# EAGLE board Timer Alarm (EAGLE 7.6.0)

Size 73.58 x 63.39 mm. Coordinates in mm from the lower left corner, seen from the top.
Outline: 0,0 56.82,0 56.82,53.33 0,53.33 0,0
Copper layers (1*16): Top 0.035mm / dielectric 1.5mm / Bottom 0.035mm
Design rules "default": minimum track width 10mil, minimum drill 24mil, track to track 8mil, track to pad 8mil, pad to pad 8mil, via to via 8mil, smd to smd 8mil, copper to edge 40mil, drill to drill 8mil, minimum pad ring 10mil, minimum via ring 8mil, stop-mask expansion 4mil, vias tented up to drill 0mil, thermal gap 10mil

## Footprints (pad centres in the part's own frame; a part is rotated, then mirrored left to right if it is on the bottom)
LED5MM = drill 0.813 octagon: A -1.27,0; K 1.27,0
HDSP-M = drill 0.813 long: 1 -5.08,-7.62; 2 -2.54,-7.62; 3 0,-7.62; 4 2.54,-7.62; 5 5.08,-7.62; 6 5.08,7.62; 7 2.54,7.62; 8 0,7.62; 9 -2.54,7.62; 10 -5.08,7.62
PIEZO-22MM = drill 1 pad 2.54: P$1 -5,0; P$2 5,0
0207/10 = drill 0.813 octagon: 1 -5.08,0; 2 5.08,0
TL1105 = drill 1 pad 1.676: 1 -2.25,3.25; 2 2.25,3.25; 3 -2.25,-3.25; 4 2.25,-3.25
ARDUINO_UNO = drill 1.016 pad 1.88: 0 63.5,50.8; 1 60.96,50.8; 2 58.42,50.8; 3 55.88,50.8; 3.3V 35.56,2.54; 4 53.34,50.8; 5 50.8,50.8; 5V 38.1,2.54; 6 48.26,50.8; 7 45.72,50.8; 8 41.656,50.8; 9 39.116,50.8; 10 36.576,50.8; 11 34.036,50.8; 12 31.496,50.8; 13 28.956,50.8; A0 50.8,2.54; A1 53.34,2.54; A2 55.88,2.54; A3 58.42,2.54; A4 60.96,2.54; A5 63.5,2.54; AREF 23.876,50.8; GND 26.416,50.8; GND. 43.18,2.54; GND.. 40.64,2.54; I/OREF 30.48,2.54; N/C 27.94,2.54; RESET 33.02,2.54; SCL 18.796,50.8; SDA 21.336,50.8; VIN 45.72,2.54 | hole 3.2: 66.04,7.62; 66.04,35.56; 15.24,50.8; 13.97,2.54
DIL16 = drill 0.813 long: 1 -8.89,-3.81; 2 -6.35,-3.81; 3 -3.81,-3.81; 4 -1.27,-3.81; 5 1.27,-3.81; 6 3.81,-3.81; 7 6.35,-3.81; 8 8.89,-3.81; 9 8.89,3.81; 10 6.35,3.81; 11 3.81,3.81; 12 1.27,3.81; 13 -1.27,3.81; 14 -3.81,3.81; 15 -6.35,3.81; 16 -8.89,3.81

## Placement (x,y rotation side)
Dfreeze_led_pin  [LED5MM]  5,276.78 0 top  (outside the outline)
Digit3  [HDSP-M]  5,22.78 0 top
Digit4  [HDSP-M]  5,35.48 0 top
Digit5  [HDSP-M]  5,48.18 0 top
Digit6  [HDSP-M]  5,60.88 0 top
PIEZOpiezo_pin  [PIEZO-22MM]  5,162.48 0 top  (outside the outline)
R1  470‎Ω  [0207/10]  5,73.58 0 top  (outside the outline)
R2  470‎Ω  [0207/10]  5,86.28 0 top  (outside the outline)
R3  470‎Ω  [0207/10]  5,98.98 0 top  (outside the outline)
R4  470‎Ω  [0207/10]  5,111.68 0 top  (outside the outline)
R5  470‎Ω  [0207/10]  5,124.38 0 top  (outside the outline)
R6  470‎Ω  [0207/10]  5,137.08 0 top  (outside the outline)
R7  470‎Ω  [0207/10]  5,149.78 0 top  (outside the outline)
R8  1k‎Ω  [0207/10]  5,175.18 0 top  (outside the outline)
R13  1k‎Ω  [0207/10]  5,365.68 0 top  (outside the outline)
R14  1k‎Ω  [0207/10]  5,378.38 0 top  (outside the outline)
R15  1k‎Ω  [0207/10]  5,391.08 0 top  (outside the outline)
R16  1k‎Ω  [0207/10]  5,403.78 0 top  (outside the outline)
R17  1k‎Ω  [0207/10]  5,416.48 0 top  (outside the outline)
R18  1k‎Ω  [0207/10]  5,429.18 0 top  (outside the outline)
R19  1k‎Ω  [0207/10]  5,238.68 0 top  (outside the outline)
R20  1k‎Ω  [0207/10]  5,251.38 0 top  (outside the outline)
R21  1k‎Ω  [0207/10]  5,264.08 0 top  (outside the outline)
S5  [TL1105]  5,289.48 0 top  (outside the outline)
Sminutes_tens  [TL1105]  5,340.28 0 top  (outside the outline)
Sminutes_units  [TL1105]  5,352.98 0 top  (outside the outline)
Sreset_btn1  [TL1105]  5,302.18 0 top  (outside the outline)
Sseconds_tens  [TL1105]  5,314.88 0 top  (outside the outline)
Sseconds_units  [TL1105]  5,327.58 0 top  (outside the outline)
Sspeed2x_pin  [TL1105]  5,225.98 0 top  (outside the outline)
Sspeed3x_pin  [TL1105]  5,213.28 0 top  (outside the outline)
Sspeed4x_pin  [TL1105]  5,200.58 0 top  (outside the outline)
Sstart_pin  [TL1105]  5,187.88 0 top  (outside the outline)
U1  [ARDUINO_UNO]  5,10.08 0 top
U2  [DIL16]  5,441.88 0 top  (outside the outline)

## Library data of the parts
Dfreeze_led_pin Digit3-Digit6 PIEZOpiezo_pin R1-R8 R13-R21 S5 Sminutes_tens Sminutes_units Sreset_btn1 Sseconds_tens Sseconds_units Sspeed2x_pin Sspeed3x_pin Sspeed4x_pin Sstart_pin U1 U2 = AUTODESK_CIRCUITS_BREADBOARD

## Nets
N$1: Digit3.9 Digit4.9 Digit5.9 Digit6.9 R2.2
N$2: Digit3.2 Digit4.2 Digit5.2 Digit6.2 R5.2
N$3: R4.1 U2.4
N$4: U1.12 U2.11
N$5: PIEZOpiezo_pin.P$1 U1.9
N$6: R8.2 Sstart_pin.4 U1.13
N$7: Sstart_pin.3 U1.GND
N$8: S5.2 U1.A0
N$9: R17.2 Sreset_btn1.4
N$10: R16.2 Sseconds_tens.4
N$11: R14.2 Sminutes_tens.4
N$12: R13.2 Sminutes_units.4
N$13: R21.2 Sspeed2x_pin.3
N$14: R20.2 Sspeed3x_pin.3
N$15: R19.2 Sspeed4x_pin.3
N$16: Sspeed4x_pin.1 U1.10
N$17: Sspeed2x_pin.1 U1.6
N$18: Sspeed3x_pin.1 U1.7
N$19: Sminutes_units.2 U1.5
N$20: Sminutes_tens.2 U1.4
N$21: Sseconds_tens.2 U1.2
N$22: Sreset_btn1.2 U1.1
N$23: R1.1 U2.6
N$24: Digit3.8 U1.A5
N$25: Digit6.8 U1.A4
N$26: Digit5.8 U1.A3
N$27: Digit3.1 Digit4.1 Digit5.1 Digit6.1 R4.2
N$28: Digit6.3
N$29: Digit6.5
N$30: Digit3.6 Digit4.6 Digit5.6 Digit6.6 R7.2
N$31: Digit5.3
N$32: Digit5.5
N$33: Digit4.8 U1.A2
N$34: Digit4.5
N$35: R7.1 U2.1
N$36: Digit3.4 Digit4.4 Digit5.4 Digit6.4 R3.2
N$37: Digit3.7 Digit4.7 Digit5.7 Digit6.7 R6.2
N$38: Digit3.10 Digit4.10 Digit5.10 Digit6.10 R1.2
N$39: Digit4.3
N$40: R6.1 U2.15
N$41: R5.1 U2.3
N$42: R3.1 U2.2
N$43: Digit3.3
N$44: Digit3.5
N$45: R15.2 Sseconds_units.4
N$46: Sseconds_units.2 U1.3
N$47: U1.8 U2.12
N$48: R2.1 U2.5
N$49: U2.7
N$50: R18.1 U1.A1
N$51: Dfreeze_led_pin.A R18.2
N$52: Dfreeze_led_pin.K PIEZOpiezo_pin.P$2 S5.1 Sminutes_tens.3 Sminutes_units.3 Sreset_btn1.3 Sseconds_tens.3 Sseconds_units.3 Sspeed2x_pin.2 Sspeed3x_pin.2 Sspeed4x_pin.2 U1.GND. U2.8 U2.9 U2.13
N$53: U1.11 U2.14
N$54: R8.1 R13.1 R14.1 R15.1 R16.1 R17.1 R19.1 R20.1 R21.1 U1.5V U2.10 U2.16

## Tracks (layer width: path | path; a pad name or v marks a point on that pad's centre or on a via)
N$1  (4 unrouted)
N$2  (4 unrouted)
N$3  (1 unrouted)
N$4  (1 unrouted)
N$5  (1 unrouted)
N$6  (2 unrouted)
N$7  (1 unrouted)
N$8  (1 unrouted)
N$9  (1 unrouted)
N$10  (1 unrouted)
N$11  (1 unrouted)
N$12  (1 unrouted)
N$13  (1 unrouted)
N$14  (1 unrouted)
N$15  (1 unrouted)
N$16  (1 unrouted)
N$17  (1 unrouted)
N$18  (1 unrouted)
N$19  (1 unrouted)
N$20  (1 unrouted)
N$21  (1 unrouted)
N$22  (1 unrouted)
N$23  (1 unrouted)
N$24  (1 unrouted)
N$25  (1 unrouted)
N$26  (1 unrouted)
N$27  (4 unrouted)
N$30  (4 unrouted)
N$33  (1 unrouted)
N$35  (1 unrouted)
N$36  (4 unrouted)
N$37  (4 unrouted)
N$38  (4 unrouted)
N$40  (1 unrouted)
N$41  (1 unrouted)
N$42  (1 unrouted)
N$45  (1 unrouted)
N$46  (1 unrouted)
N$47  (1 unrouted)
N$48  (1 unrouted)
N$50  (1 unrouted)
N$51  (1 unrouted)
N$52  (14 unrouted)
N$53  (1 unrouted)
N$54  (11 unrouted)